# Altium PCB MainBoard.PcbDoc
Units mil, origin at the board's own origin, x right, y up, seen from the top; angles counter-clockwise.
Board outline 4000 x 2000 mil, 2 copper layers (Top Layer, Bottom Layer); 50 components, 41 nets, 178 pads, 6 vias.
Unrouted connection lines stored in the file: 112.
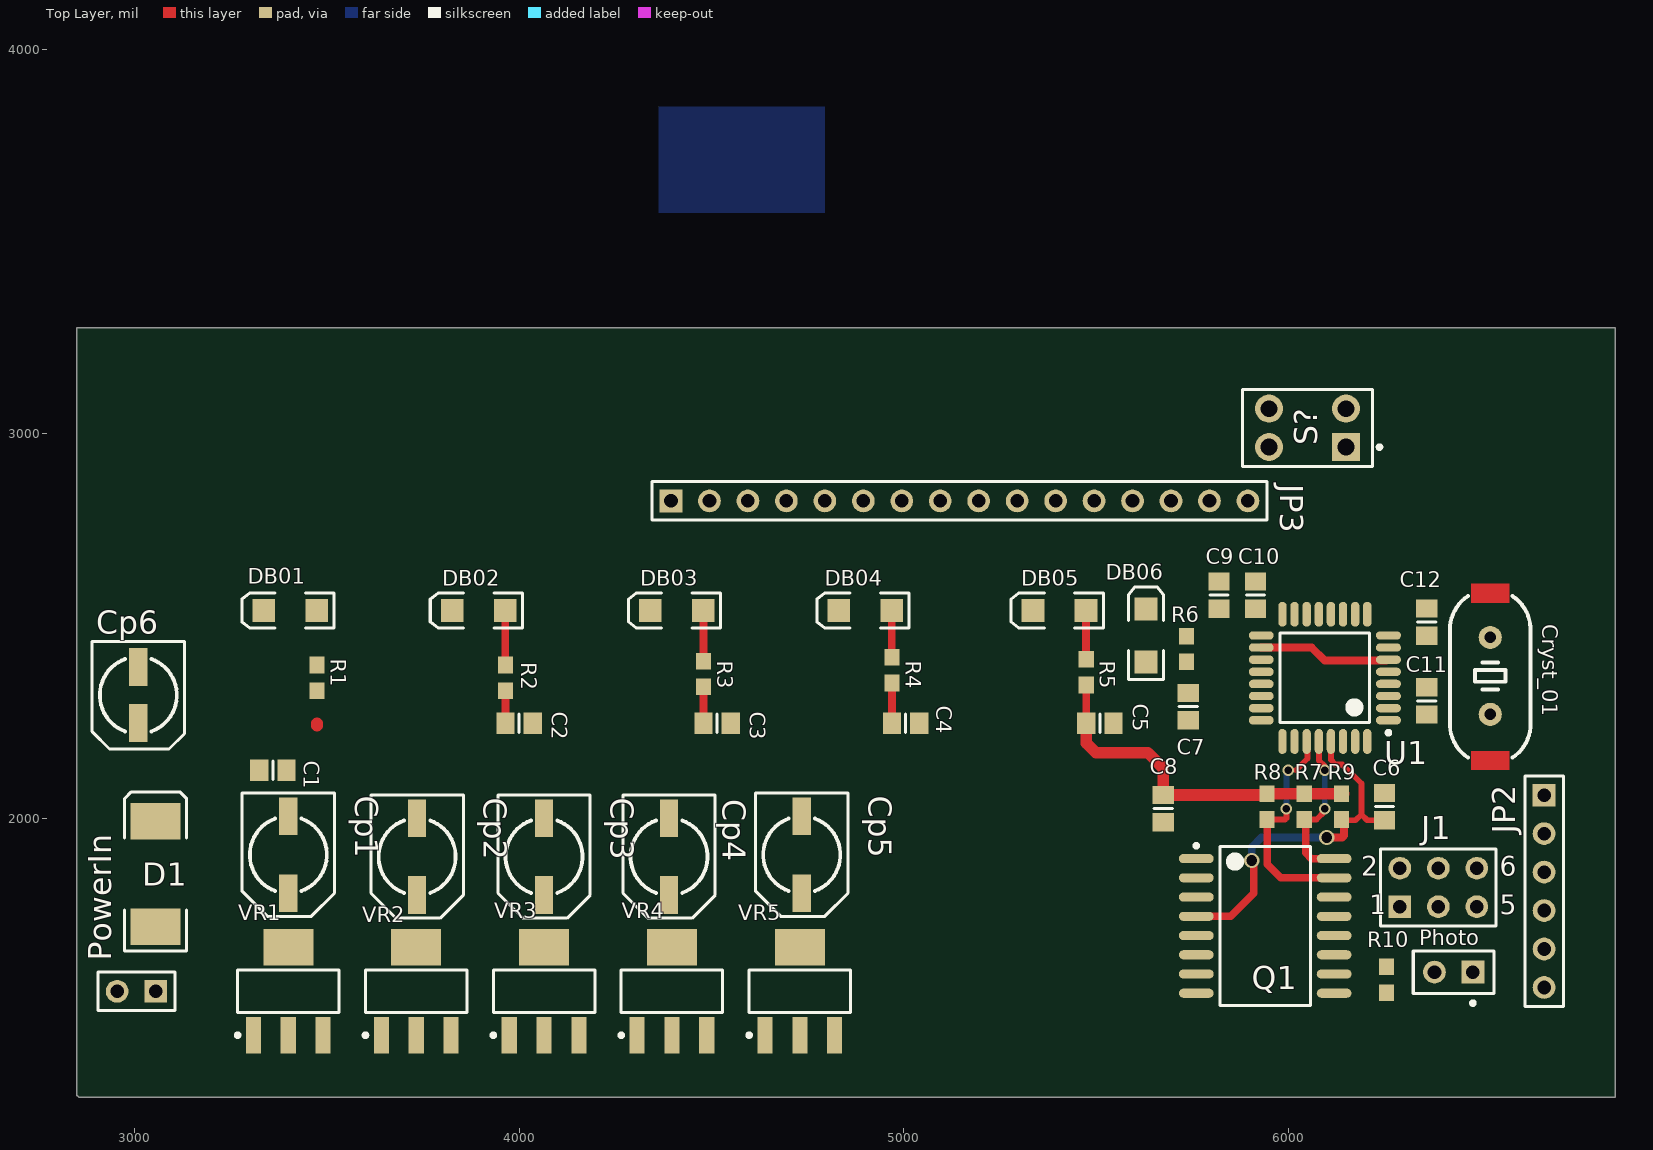
[diagram p0: Top Layer view]
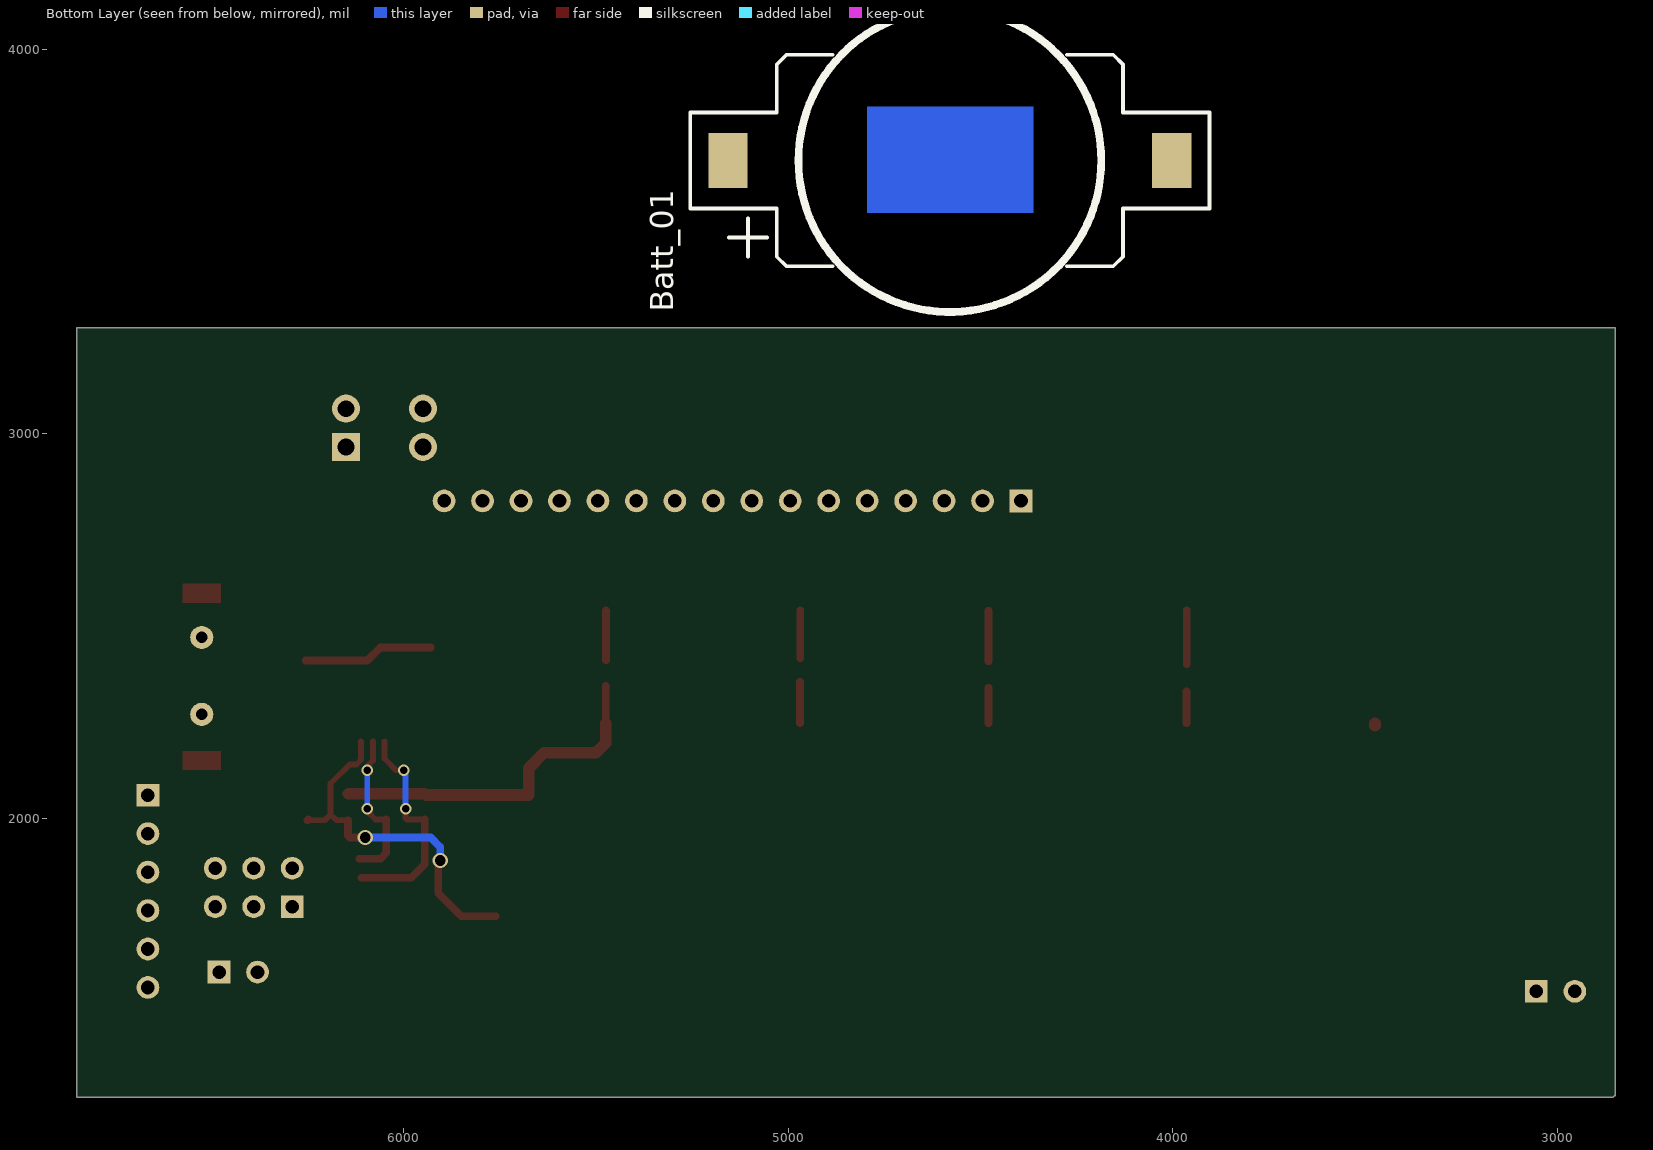
[diagram p1: Bottom Layer view, seen from below]

## Layer stack, top to bottom
Top Solder: solder mask 0.4, Solder Resist, Dk 3.5
Top Layer: signal copper 1.4
Dielectric 1: dielectric 12.6, FR-4, Dk 4.8
Bottom Layer: signal copper 1.4
Bottom Solder: solder mask 0.4, Solder Resist, Dk 3.5

## Board outline
2855,1275 2850,1280 2850,3275 6850,3275 6850,1275

## Design rules (kind name [scope] priority, off if disabled: settings)
Clearance [All] p1: gap=5
Clearance Clearance_1 [InComponent('U1')] p2: gap=5
PolygonConnect [All] p1: connectstyle=Relief reliefconductorwidth=10 reliefentries=4 polygonreliefangle="90 Angle" airgapwidth=10
RoutingVias [All] p1: holewidth=28 width=50 viastyle="Through Hole" minholewidth=28 minwidth=50 maxholewidth=28 maxwidth=50
SolderMaskExpansion [All] p1: expansion=4
Width [All] p1: maxlimit=40 minlimit=10 preferedwidth=10 checkconnectedcopper=TRUE
30 further rules are at their usual default settings.

## Components (designator, comment, footprint, x,y, rotation, side; value= is the part's Value field where it differs from the comment)
Batt_01 "2032 Battery Holder, SMT" PCBComponent_1 4580,3710 r0 bottom
C1 "Cap Semi" 6-0805_N 3360,2125 r180 top
C2 "Cap Semi" 6-0805_N 4000,2247.17 r180 top
C3 "Cap Semi" 6-0805_N 4515,2247.17 r180 top
C4 "Cap Semi" 6-0805_N 5005,2247.17 r180 top
C5 "Cap Semi" 6-0805_N 5510,2247.17 r180 top
C6 "Cap Semi" 6-0805_N 6250,2030 r270 top
C7 "Cap Semi" 6-0805_N 5740,2290 r90 top
C8 "Cap Semi" 6-0805_N 5675,2025 r90 top
C9 "Cap Semi" 6-0805_N 5820,2580 r90 top
C10 "Cap Semi" 6-0805_N 5915,2580 r90 top
C11 "Cap Semi" 6-0805_N 6360,2305 r90 top
C12 "Cap Semi" 6-0805_N 6360,2510 r90 top
Cp1 "Cap Pol3" 1CA470WR#1 3400,1905 r270 top
Cp2 "Cap Pol3" 1CA470WR#1 3735,1900 r270 top
Cp3 "Cap Pol3" 1CA470WR#1 4065,1900 r270 top
Cp4 "Cap Pol3" 1CA470WR#1 4390,1900 r270 top
Cp5 "Cap Pol3" 1CA470WR#1 4735,1905 r270 top
Cp6 "Cap Pol3" 1CA470WR#2 3010,2320 r270 top
Cryst_01 "Crystal Oscillator" "Crystal Oscillator" 6525,2370 r90 top
D1 "Diode" SMC 3055,1855 r90 top
DB01 "LED2" 3.2X1.6X1.1 3405,2540 r180 top
DB02 "LED2" 3.2X1.6X1.1 3895,2540 r180 top
DB03 "LED2" 3.2X1.6X1.1 4410,2540 r180 top
DB04 "LED2" 3.2X1.6X1.1 4900,2540 r180 top
DB05 "LED2" 3.2X1.6X1.1 5405,2540 r180 top
DB06 "LED2" 3.2X1.6X1.1 5630,2475 r90 top
J1 "ICSP" HDR2X3 6290,1770 r0 top
JP2 "UART" HDR1X6 6665,2060 r270 top
JP3 "Header 16" HDR1X16 4395,2825 r0 top
Photo "Photo Sen" PIN2 6480,1600 r180 top
PowerIn "Header 2" HDR1X2 3055,1550 r180 top
Q1 "DS3231SN" W16-H2_N 5940,1720 r0 top
R1 "Res2" J1-0603 3474.57,2365 r270 top
R2 "Res2" J1-0603 3964.57,2365 r270 top
R3 "Res2" J1-0603 4479.57,2375 r270 top
R4 "Res2" J1-0603 4969.57,2385 r270 top
R5 "Res2" J1-0603 5474.57,2380 r270 top
R6 "Res2" J1-0603 5735,2440 r270 top
R7 "Res2" J1-0603 6041.44,2030 r270 top
R8 "Res2" J1-0603 5945,2030 r90 top
R9 "Res2" J1-0603 6137.88,2030 r270 top
R10 "Res2" J1-0603 6255,1580 r90 top
S? "SW-DPST" DPST-4 6050,3015 r180 top
U1 "ATmega328P-AU" 32A_N 6095,2365 r180 top
VR1 "5V" SOT223_N 3400,1550 r90 top
VR2 "5V" SOT223_N 3732.5,1550 r90 top
VR3 "5V" SOT223_N 4065,1550 r90 top
VR4 "5V" SOT223_N 4397.5,1550 r90 top
VR5 "5V" SOT223_N 4730,1550 r90 top

## Footprints (in the part's own frame and the unit in brackets; to place one, negate y for a bottom-side part, rotate by r counter-clockwise, add the part's x,y. Pads: shape width x height; smd on the part's side, far side on the other; paste and mask are expansions set on the pad)
1CA470WR#1 [mm]
  rect 2.5x1.2 smd: 1(2.54,0) 2(-2.54,0)
  silkscreen extent -4.06,-3.05 4.06,3.05
1CA470WR#2 [mm]
  rect 2.5x1.2 smd: 1(1.85,0) 2(-1.85,0)
  silkscreen extent -3.56,-3.05 3.56,3.05
3.2X1.6X1.1 [mm] "SMT LED; 2 Flat Leads"
  rect 1.5x1.5 smd: 1(-1.75,0) 2(1.75,0)
  silkscreen extent -2.9,-1.15 3.2,1.15
6-0805_N [mm] "Chip Resistor, Body 2.0x1.2mm, IPC Medium Density"
  rect 1.2x1.4 smd: 1(-0.9,0) 2(0.9,0)
  silkscreen extent 0,-0.6 0,0.6, body extent -1.07,-0.7 1.07,0.7, height 0.7
32A_N [mm] "Thin QFP, 32-Leads, Body 7x7mm, Pitch 0.8mm, IPC Medium Density"
  oval 1.65x0.55 smd: 1(-4.2,2.8) 2(-4.2,2) 3(-4.2,1.2) 4(-4.2,0.4) 5(-4.2,-0.4) 6(-4.2,-1.2) 7(-4.2,-2) 8(-4.2,-2.8) 17(4.2,-2.8) 18(4.2,-2) 19(4.2,-1.2) 20(4.2,-0.4) 21(4.2,0.4) 22(4.2,1.2) 23(4.2,2) 24(4.2,2.8)
  oval 0.55x1.65 smd: 9(-2.8,-4.2) 10(-2,-4.2) 11(-1.2,-4.2) 12(-0.4,-4.2) 13(0.4,-4.2) 14(1.2,-4.2) 15(2,-4.2) 16(2.8,-4.2) 25(2.8,4.2) 26(2,4.2) 27(1.2,4.2) 28(0.4,4.2) 29(-0.4,4.2) 30(-1.2,4.2) 31(-2,4.2) 32(-2.8,4.2)
  silkscreen extent -4.33,-2.95 2.95,3.75, body extent -3.5,-3.5 3.5,3.5, height 1.2
"Crystal Oscillator" [mil]
  round 60 hole 30: 1(-100,0) 2(100,0)
  Top Layer region: 190,-50 240,-50 240,50 190,50
  Top Layer region: -195,50 -245,50 -245,-50 -195,-50
  silkscreen extent -212,-105 207,105
DPST-4 [mm] "Switch; 4 Leads"
  rect 1.85x1.85 hole 1.1: 1(-2.54,1.27)
  round 1.85 hole 1.1: 2(-2.54,-1.27) 3(2.54,-1.27) 4(2.54,1.27)
  silkscreen extent -4.88,-2.54 4.28,2.54
HDR1X2 [mm] "Connector; Header; 2 Position"
  rect 1.5x1.5 hole 0.9: 1(0,0)
  round 1.5 hole 0.9: 2(2.54,0)
  silkscreen extent -1.27,-1.27 3.81,1.27
HDR1X6 [mm] "Connector; Header; 6 Position"
  rect 1.5x1.5 hole 0.9: 1(0,0)
  round 1.5 hole 0.9: 2(2.54,0) 3(5.08,0) 4(7.62,0) 5(10.16,0) 6(12.7,0)
  silkscreen extent -1.27,-1.27 13.97,1.27
HDR1X16 [mm] "Connector; Header; 16 Position"
  rect 1.5x1.5 hole 0.9: 1(0,0)
  round 1.5 hole 0.9: 2(2.54,0) 3(5.08,0) 4(7.62,0) 5(10.16,0) 6(12.7,0) 7(15.24,0) 8(17.78,0) 9(20.32,0) 10(22.86,0) 11(25.4,0) 12(27.94,0) 13(30.48,0) 14(33.02,0) 15(35.56,0) 16(38.1,0)
  silkscreen extent -1.27,-1.27 39.37,1.27
HDR2X3 [mm] "Connector; Header; 3x2 Position"
  rect 1.5x1.5 hole 0.9: 1(0,0)
  round 1.5 hole 0.9: 2(0,2.54) 3(2.54,0) 4(2.54,2.54) 5(5.08,0) 6(5.08,2.54)
  silkscreen extent -1.27,-1.27 6.35,3.81
J1-0603 [mm] "Chip Resistor; Body 1.6 x 0.8 mm (LxW typ)"
  rect 1.1x1 smd: 1(-0.85,0) 2(0.85,0)
PCBComponent_1 [mil]
  rect 102x142 smd: 1(577,0) 2(-577,0)
  Top Layer region: -218.07,135.98 215,135.98 215,-140 -218.07,-140
  silkscreen extent -675,-394 675,394
PIN2 [mm] "Photosensitive Diode; 2 Leads"
  rect 1.5x1.5 hole 0.9: 1(0,0)
  round 1.5 hole 0.9: 2(2.54,0)
  silkscreen extent -1.4,-1.4 3.94,2.17
SMC [mm] "DO-214-AB/SMC; 2 C-Bend Leads; Body 7.9 x 5.9 mm, inc. leads (LxW)"
  rect 2.4x3.3 smd: 1(-3.475,0) 2(3.475,0)
  silkscreen extent -5.07,-2.05 5.43,2.05
SOT223_N [mm] "SOT223, 4-Leads, Body 6.5x3.5mm, Pitch 2.3mm, Lead Span 7mm, IPC Medium Density"
  rect 2.4x1 smd: 1(-2.9,2.3) 2(-2.9,0) 3(-2.9,-2.3)
  rect 2.4x3.3 smd: 4(2.9,0)
  silkscreen extent -3.02,-3.35 1.4,3.47, body extent -1.85,-3.35 1.85,3.35, height 1.7
W16-H2_N [mm] "SOIC, 16-Leads, Body 10.3x7.5mm, Pitch 1.27mm, IPC Medium Density"
  oval 2.3x0.6 smd: 1(-4.55,4.445) 2(-4.55,3.175) 3(-4.55,1.905) 4(-4.55,0.635) 5(-4.55,-0.635) 6(-4.55,-1.905) 7(-4.55,-3.175) 8(-4.55,-4.445) 9(4.55,-4.445) 10(4.55,-3.175) 11(4.55,-1.905) 12(4.55,-0.635) 13(4.55,0.635) 14(4.55,1.905) 15(4.55,3.175) 16(4.55,4.445)
  silkscreen extent -4.67,-5.25 3,5.42, body extent -3.8,-5.25 3.8,5.25, height 2.65

## Part data
C1 C2 C3 C4 C5 C6 C7 C8 C9 C10 C11 C12: "Capacitor (Semiconductor SIM Model)"
Cp1 Cp2 Cp3 Cp4 Cp5 Cp6: "Polarized Capacitor (Surface Mount)"
D1: "Default Diode"
DB01 DB02 DB03 DB04 DB05 DB06: "Typical RED, GREEN, YELLOW, AMBER GaAs LED"
J1: library part "Header 3X2", "Header, 3-Pin, Dual row"
JP2: library part "Header 6", "Header, 6-Pin"
JP3: "Header, 16-Pin"
Photo: "Photosensitive Diode"
PowerIn: "Header, 2-Pin"
R1 R2 R3 R4 R5 R6 R7 R8 R9 R10: "Resistor"
S?: "Double-Pole, Single-Throw Switch"
U1: "8-bit AVR Microcontroller, 32KB Flash, 1KB EEPROM, 2KB SRAM, 32-pin TQFP, Industrial Grade (-40°C to 85°C)"
VR1 VR2 VR3 VR4 VR5: library part "Volt Reg", "Voltage Regulator"

## Via types
v1: diameter 30, hole 20, Top Layer to Bottom Layer, 4 vias
v2: diameter 40, hole 28, Top Layer to Bottom Layer, 2 vias

## Nets (pads, with @x,y where several pads share a name; then routed paths per layer and width w, separated by ;. In a path a pad name is that pad's centre, name@x,y a point inside that pad or via, vN(x,y) a via of type N, cw(c..) or ccw(c..) an arc to the next point about the centre after c; other vN are vias at no path point)
GND: Batt_01.2 C1.1 C2.1 C3.1 C4.1 C5.1 C7.1 C8.1 C9.2 C10.2 C11.2 C12.2 Cp1.2 Cp2.2 Cp3.2 Cp4.2 Cp5.2 Cp6.2 DB01.2 DB02.2 DB03.2 DB04.2 DB05.2 DB06.2 J1.6 JP2.1 JP2.2 JP3.1 PowerIn.2 Q1.5 Q1.6 Q1.7 Q1.8 Q1.9 Q1.10 Q1.11 Q1.12 Q1.13 R10.1 S?.1 U1.3 U1.5 U1.21 VR1.1 VR2.1 VR3.1 VR4.1 VR5.1
NetBatt_01_1: Batt_01.1 Q1.14
NetC1_2: C1.2 Cp1.1 JP3.2 R1.2 VR1.2 VR1.4 | length 6.7
  Top Layer w30: 3474.57,2240.43 3474.57,2245 3474.57,2247.17
NetC2_2: C2.2 Cp2.1 JP3.3 R2.2 VR2.2 VR2.4 | length 82.4
  Top Layer w20: C2.2 R2.2@3964.57,2329.57
NetC3_2: C3.2 Cp3.1 JP3.4 R3.2 VR3.2 VR3.4 | length 92.4
  Top Layer w20: C3.2 R3.2@4479.57,2339.57
NetC4_2: C4.2 Cp4.1 JP3.5 R4.2 VR4.2 VR4.4 | length 107.4
  Top Layer w20: C4.2 R4.2 R4.2@4969.57,2354.57
NetC5_2: C5.2 C8.2 C9.1 C10.1 Cp5.1 J1.2 JP2.3 Photo.1 Q1.2 R5.2 R7.1 R8.2 R9.1 U1.4 U1.6 U1.18 VR5.2 VR5.4 | length 1250.1
  Top Layer w20: C5.2 R5.2@5474.57,2344.57 ; U1.18 6061.26,2443.74 6095,2410 U1.6@6255,2410
  Top Layer w30: C5.2 5474.57,2195.43 5500,2170 5635,2170 5675,2130 C8.2 5940.43,2060.43 R8.2@5940.87,2060 ; R8.2 R9.1@6143.46,2063.46
NetC6_1: C6.1 JP2.6
NetC6_2: C6.2 J1.5 Q1.4 R9.2 S?.2 U1.29 | length 938.5
  Top Layer w10: R9.2@6140,1995 R9.2@6145,1995
  Top Layer w15: U1.29 6110.75,2152.09 6122.83,2140 6140,2140 6190,2090 6190,2010 ; R9.2@6145,1995 6175,1995 6190,2010 ; C6.2@6250,1995 6205,1995 6190,2010
  Top Layer w20: Q1.4 5850,1745 5910,1805 v2@5910,1890 ; v2(6100,1950) 6140,1950 6145,1955 R9.2@6145,1995 ; C6.2@6248.46,1996.54 C6.2@6250,1995
  Bottom Layer w20: v2(5905,1890) 5905,1925 5930,1950 v2@6095,1950
NetC7_2: C7.2 U1.20
NetC11_1: C11.1 Cryst_01.1 U1.7
NetC12_1: C12.1 Cryst_01.2 U1.8
NetCp6_1: Cp6.1 D1.2 VR1.3 VR2.3 VR3.3 VR4.3 VR5.3
NetD1_1: D1.1 PowerIn.1
NetDB01_1: DB01.1 R1.1
NetDB02_1: DB02.1 R2.1 | length 138.9
  Top Layer w20: R2.1@3963.9,2401.1 DB02.1
NetDB03_1: DB03.1 R3.1 | length 131.1
  Top Layer w20: R3.1 DB03.1@4479.57,2539.57
NetDB04_1: DB04.1 R4.1 | length 123.9
  Top Layer w20: R4.1@4968.9,2416.1 DB04.1
NetDB05_1: DB05.1 R5.1 | length 128.9
  Top Layer w20: R5.1@5473.9,2411.1 DB05.1
NetDB06_1: DB06.1 R6.2
NetJ1_1: J1.1 U1.16
NetJ1_3: J1.3
NetJ1_4: J1.4 U1.15
NetJP2_4: JP2.4 U1.30
NetJP2_5: JP2.5 U1.31
NetJP3_6: JP3.6 U1.23
NetJP3_7: JP3.7 U1.24
NetJP3_8: JP3.8 U1.25
NetJP3_9: JP3.9 U1.1
NetJP3_10: JP3.10 U1.2
NetJP3_11: JP3.11 U1.14
NetJP3_12: JP3.12 U1.13
NetJP3_13: JP3.13 U1.12
NetJP3_14: JP3.14 U1.11
NetJP3_15: JP3.15 U1.10
NetJP3_16: JP3.16 U1.9
NetPhoto_2: Photo.2 R10.2 U1.26
NetQ1_15: Q1.15 R8.1 U1.27 | length 582
  Top Layer w10: 5991.54,1996.54 5995,2000 ; v1(6000,2125) 6020,2125
  Top Layer w15: R8.1 5991.54,1996.54 ; 5995,2000 v1(5995,2025) ; 6020,2125 6050,2155 U1.27@6050,2200
  Top Layer w20: R8.1 5945,1880 5980,1845 Q1.15@6110,1845
  Bottom Layer w10: v1@5995,2120 v1(6000,2125)
  Bottom Layer w15: v1(5995,2025) v1@5995,2120
NetQ1_16: Q1.16 R7.2 U1.28 | length 409.8
  Top Layer w10: v1@6095,2018.15 v1(6095,2025) ; v1(6095,2125) v1@6095,2135
  Top Layer w15: R7.2@6045,1996.54 6073.39,1996.54 v1@6095,2018.15 ; U1.28@6080,2200 6080,2150 v1@6095,2135
  Top Layer w20: R7.2@6045,1996.54 6045,1910 6060,1895 Q1.16@6115,1895
  Bottom Layer w15: v1(6095,2025) v1(6095,2125)
NetR6_1: R6.1 U1.17
NetU1_32: U1.32
pads on no net: Q1.1 Q1.3 S?.3 S?.4 U1.19 U1.22

## Text inside footprints (layer, text, board x,y; h text height)
J1: Top Overlay "6" at 6550,1850 h50; Top Overlay "5" at 6550,1750 h50; Top Overlay "2" at 6190,1850 h50; Top Overlay "1" at 6210,1750 h50